# Allegro board PCB.brd
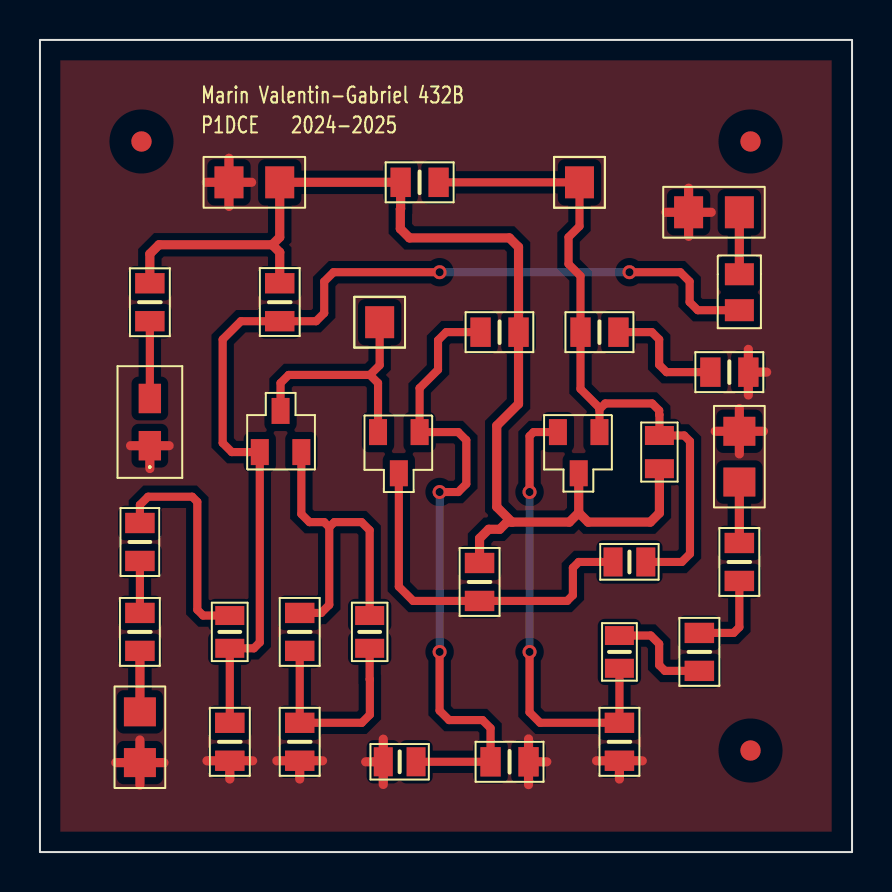
[diagram p0: board, top side]
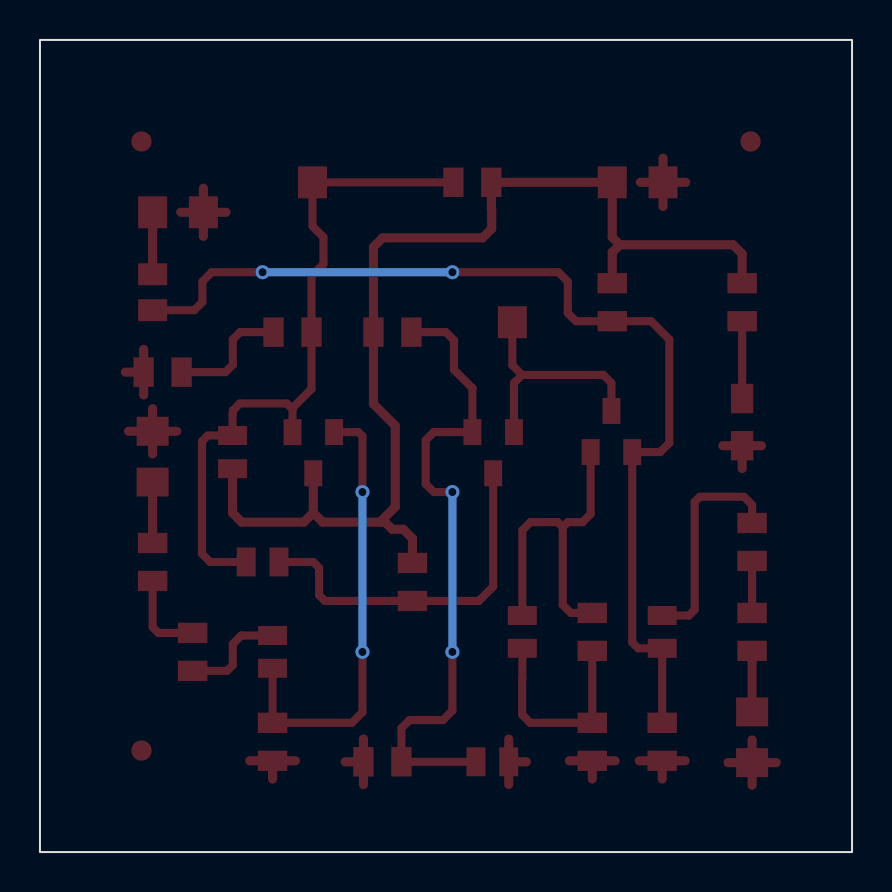
[diagram p1: board, bottom side, seen from below]

Outline 40.64 x 40.64 mm; copper layers: TOP, BOTTOM. Coordinates in mm from the lower left corner of the outline.
Outline path: rectangle 0,0 40.64,40.64

## Design rules (mm)
nets with their own width: min track width 0.406; nets N84903 N85039 N85173 N85179 N85261 N85321 N85327 N85381 N85413 N85469 N85679 N85693 N85701 N85711
nets with their own width: min track width 0.457; nets GND V03+ V13+ VIN VOUT

## Placement (name value [footprint] x y rotation side)
C1  4.7u  [CAPC2012X140N]  9.5 11.02 90 top
C2  4.7u  [CAPC2012X140N]  16.5 11.02 270 top
C3  4.7u  [CAPC2012X140N]  18 4.52 180 top
C4  4.7u  [CAPC2012X140N]  29.5 14.52 180 top
C5  5.6n  [CAPC2012X95N]  31 20.02 90 top
C6  4.7u  [CAPC2012X140N]  29 10.02 90 top
D1  D1N4148  [DIOC2012X95N]  35 28.02 90 top
D2  SMLS14BET  [OFSMD2012B]  5.5 21.52 90 top
J1  CON2  [JUMPER2]  5 7.02 270 top
J2  CON2  [JUMPER2]  12 33.52 180 top
J3  CON2  [JUMPER2]  35 32.02 180 top
J4  CON2  [JUMPER2]  35 18.52 90 top
J5  CON1  [JUMPER1]  17 26.52 0 top
J6  CON1  [JUMPER1]  27 33.52 0 top
NOREF  -  []  41.66 0 90 top
NOREF#2  -  []  0 41.66 0 top
NOREF#3  -  [unnamed#2]  35.56 35.56 0 top
NOREF#4  -  [unnamed#2]  5.08 35.56 0 top
NOREF#5  -  [unnamed#2]  35.56 5.08 0 top
Q1  BC817-25  [TO236AA]  11 20.02 270 top
Q2  BC817-25  [TO236AA]  19 21.02 90 top
Q3  BC817-25  [TO236AA]  28 21.02 90 top
R1  680  [RESC2013X65N]  5.5 27.52 90 top
R2  3.3k  [RESC2013X65N]  12 27.52 90 top
R3  1k  [RESC2013X65N]  9.5 5.52 90 top
R4  1k  [RESC2013X65N]  13 11.02 90 top
R5  33  [RESC2013X65N]  13 5.52 90 top
R6  2k  [RESC2013X65N]  22 13.52 90 top
R7  10k  [RESC2013X65N]  23 26.02 0 top
R8  10k  [RESC2013X65N]  23.5 4.52 180 top
R9  22k  [RESC2013X65N]  19 33.52 180 top
R10  10k  [RESC2013X65N]  28 26.02 180 top
R11  1k  [RESC2013X65N]  34.5 24.02 180 top
R12  1k  [RESC2013X65N]  29 5.52 90 top
RG1  51  [RESC2012X60N]  5 15.52 90 top
RG2  10  [RESC2013X65N]  5 11.02 90 top
RL1  470  [RESC2013X65N]  33 10.02 270 top
RL2  330  [RESC2013X65N]  35 14.52 90 top

## Library data of the parts
C1-C6 = C
D1 = 1N4148
D2 = SMLS14BET
J1-J4 = CON2: User Part Number: ***
J5 J6 = CON1: User Part Number: ***
Q1-Q3 = BC817-25
R1-R12 RG1 RG2 RL1 RL2 = R

## Footprints (pads in the part's own frame, mm; a bottom-side part is the same pattern mirrored in y, then rotated)
CAPC2012X95N
  rect 0.95x1.45 smd: 1(-0.831,0) 2(0.831,0)
CAPC2012X140N
  rect 0.95x1.45 smd: 1(-0.82,0) 2(0.82,0)
DIOC2012X95N
  rect 1.1x1.45 smd: 1(-0.899,0) 2(0.899,0)
JUMPER1
  rect 1.45x1.6 smd: 1(0,0)
JUMPER2
  rect 1.45x1.6 smd: 1(0,0) 2(2.54,0)
OFSMD2012B
  rect 1.473x1.118 smd: 1(-1.181,0) 2(1.181,0)
RESC2012X60N
  rect 1.016x1.473 smd: 1(-0.95,0) 2(0.95,0)
RESC2013X65N
  rect 1.016x1.473 smd: 1(-0.95,0) 2(0.95,0)
TO236AA
  rect 1.3x0.899 smd: 1(0,0) 2(0,2.08) 3(-2.06,1.039)
unnamed#2
  round 1.016 smd: (0,0)

## Nets
GND: C3.2 D2.1(C) J1.2 J2.2 J3.2 J4.2 R3.1 R5.1 R8.1 R11.1 R12.1
V03+: D1.2 J3.1
V13+: C5.1 J2.1 Q3.3 R1.2 R2.2 R6.2 R7.2 R9.2
VIN: J1.1 RG2.1
VOUT: J4.1 RL2.2
N84903: C1.1 D1.1 Q1.1 R2.1 R3.2
N85039: D2.2 R1.1
N85173: C4.2 Q2.3 R6.1
N85179: C4.1 C5.2 J6.1 Q3.1 R9.1 R10.2
N85261: J5.1 Q1.3 Q2.2(E)
N85321: C3.1 Q2.1 R7.1 R8.2
N85327: C6.1 Q3.2(E) R12.2
N85381: C1.2 RG1.2
N85413: C2.1 Q1.2(E) R4.2
N85469: C6.2 RL1.2
N85679: RG1.1 RG2.2
N85693: C2.2 R4.1 R5.2
N85701: R10.1 R11.2
N85711: RL1.1 RL2.1

## Via types
v1: diameter 0.701, hole 0.406, TOP to BOTTOM, 6 vias

## Routing (per net, layer and track width the routed paths; a pad name or vN(x,y) marks a point on that pad's centre or on a via; arc(x,y) is an arc through that point)
GND: length 40.9
  TOP w0.457: 29,3.65 R12.1 ; R12.1 27.86,4.57 ; R12.1 30.14,4.57 ; 35,19.92 J4.2 ; J4.2 33.79,21.06 ; J4.2 35,22.19 ; J4.2 36.21,21.06 ; R8.1 25.36,4.52 ; R8.1 24.45,5.66 ; R8.1 24.45,3.37 ; 16.3,4.52 C3.2 ; C3.2 17.18,5.65 ; C3.2 17.18,3.38 ; J2.2 10.59,33.52 ; J2.2 9.46,34.72 ; J2.2 9.46,32.31 ; J2.2 8.33,33.52 ; D2.1 6.46,20.34 ; D2.1 4.53,20.34 ; D2.1 5.5,19.19 ; R5.1 14.14,4.57 ; R5.1 13,3.65 ; R5.1 11.86,4.57 ; 3.79,4.48 J1.2 ; J1.2 5,3.34 ; J1.2 6.21,4.48 ; J1.2 5,5.61 ; 35.45,22.87 R11.1 ; R11.1 35.45,25.16 ; R11.1 36.37,24.02 ; J3.2 33.59,32.02 ; J3.2 32.46,30.81 ; J3.2 32.46,33.22 ; J3.2 31.33,32.02 ; 9.5,3.65 R3.1 ; R3.1 8.36,4.57 ; R3.1 10.64,4.57
V03+: length 3.1
  TOP w0.457: D1.2 J3.1
V13+: length 57.7
  TOP w0.457: 11.62,30.39 12,30.77 J2.1 R9.2 18.05,32.19 18.03,32.18 18.03,31.19 18.49,30.73 23.49,30.73 23.95,30.28 R7.2 23.95,22.43 22.86,21.34 22.86,17.27 23.62,16.51 ; 11.62,30.39 5.96,30.39 5.5,29.93 R1.2 ; 11.62,30.39 12,30.02 R2.2 ; 26.96,16.98 Q3.3 ; 26.96,16.98 27.43,16.51 30.54,16.51 31,16.97 C5.1 ; 26.96,16.98 26.49,16.51 23.62,16.51 ; 23.62,16.51 23.37,16.51 23.01,16.15 22.46,16.15 22,15.69 R6.2
VIN: length 3.1
  TOP w0.457: J1.1 RG2.1
VOUT: length 3.1
  TOP w0.457: J4.1 RL2.2
N84903: length 51.7
  TOP w0.406: v1(20,29.02) 14.69,29.02 14.22,28.55 14.22,26.97 13.82,26.57 R2.1 10.06,26.57 9.14,25.65 9.14,20.47 9.6,20.02 Q1.1 11,10.49 10.7,10.2 C1.1 R3.2 ; D1.1 32.92,27.12 32.51,27.52 32.51,28.55 32.04,29.02 v1(29.5,29.02)
  BOTTOM w0.406: v1(29.5,29.02) v1(20,29.02)
N85039: length 3.9
  TOP w0.406: D2.2 R1.1
N85173: length 18.3
  TOP w0.406: C4.2 26.96,14.52 26.67,14.22 26.67,12.85 26.38,12.57 R6.1 18.68,12.57 17.96,13.28 Q2.3
N85179: length 34.6
  TOP w0.406: 28,22.16 28.29,22.45 30.64,22.45 30.99,22.1 30.99,21.89 31,21.88 C5.2 32.24,20.85 32.53,20.56 32.53,14.93 32.12,14.52 C4.1 ; 28,22.16 Q3.1 ; 28,22.16 28,22.23 27.05,23.17 R10.2 27.05,28.83 26.45,29.43 26.45,30.77 27,31.32 J6.1 R9.1
N85261: length 11.9
  TOP w0.406: 16.51,23.88 12.45,23.88 12.04,23.47 Q1.3 ; 16.51,23.88 17,24.36 J5.1 ; 16.51,23.88 16.92,23.47 Q2.2
N85321: length 32.7
  TOP w0.406: v1(20,18.02) 20.93,18.02 21.34,18.42 21.34,20.61 20.93,21.02 Q2.1 19,23.22 19.92,24.14 19.92,25.61 20.33,26.02 R7.1 ; v1(20,10.02) 20,7.08 20.47,6.6 22.14,6.6 22.55,6.2 R8.2 C3.1
  BOTTOM w0.406: v1(20,10.02) v1(20,18.02)
N85327: length 22.8
  TOP w0.406: v1(24.5,10.02) 24.5,7 25.03,6.47 R12.2 C6.1 ; Q3.2 24.7,21.02 24.5,20.81 v1(24.5,18.02)
  BOTTOM w0.406: v1(24.5,10.02) v1(24.5,18.02)
N85381: length 11.2
  TOP w0.406: C1.2 8.16,11.84 7.87,12.13 7.87,17.53 7.62,17.78 5.41,17.78 5,17.37 RG1.2
N85413: length 16.9
  TOP w0.406: 14.48,16.26 14.22,16.51 13.49,16.51 13.08,16.92 Q1.2 ; 14.48,16.26 14.48,12.37 14.07,11.97 R4.2 ; 14.48,16.26 14.73,16.51 16.09,16.51 16.5,16.1 C2.1
N85469: length 5.4
  TOP w0.406: C6.2 30.57,10.84 30.99,10.41 30.99,9.35 31.28,9.07 RL1.2
N85679: length 2.6
  TOP w0.406: RG2.2 RG1.1
N85693: length 10.6
  TOP w0.406: R4.1 R5.2 16.1,6.47 16.51,6.87 16.51,8.64 16.5,8.65 C2.2
N85701: length 6.2
  TOP w0.406: R11.2 31.36,24.02 30.99,24.38 30.99,25.65 30.62,26.02 R10.1
N85711: length 4.4
  TOP w0.406: RL2.1 35,11.25 34.71,10.97 RL1.1

## Copper pours and planes (outline as drawn; the poured copper is in the pictures)
GND on TOP: 1.02,1.02 1.02,39.62 39.62,39.62 39.62,1.02 ; 1 cut-out

## Text on the board
Ref Des/Silkscreen Top: Marin Valentin-Gabriel 432B | P1DCE | 2024-2025
XSECTION_CHART: *  SURFACE - AIR 0 MIL | L1 TOP CONDUCTOR - COPPER 0.72 MIL | *  DIELECTRIC - FR-4 62.56 MIL | L2 BOTTOM CONDUCTOR - COPPER 0.72 MIL | DESIGN CROSS SECTION CHART | ___________________________ | TOTAL THICKNESS 64 MIL | 1-2
DIMENSION: FIGURE | FINISHED_SIZE | 16.0 | DRILL CHART: TOP to BOTTOM | ALL UNITS ARE IN MILS | PLATED | QTY | 6
